# EAGLE board untitled (EAGLE 9.4.0)
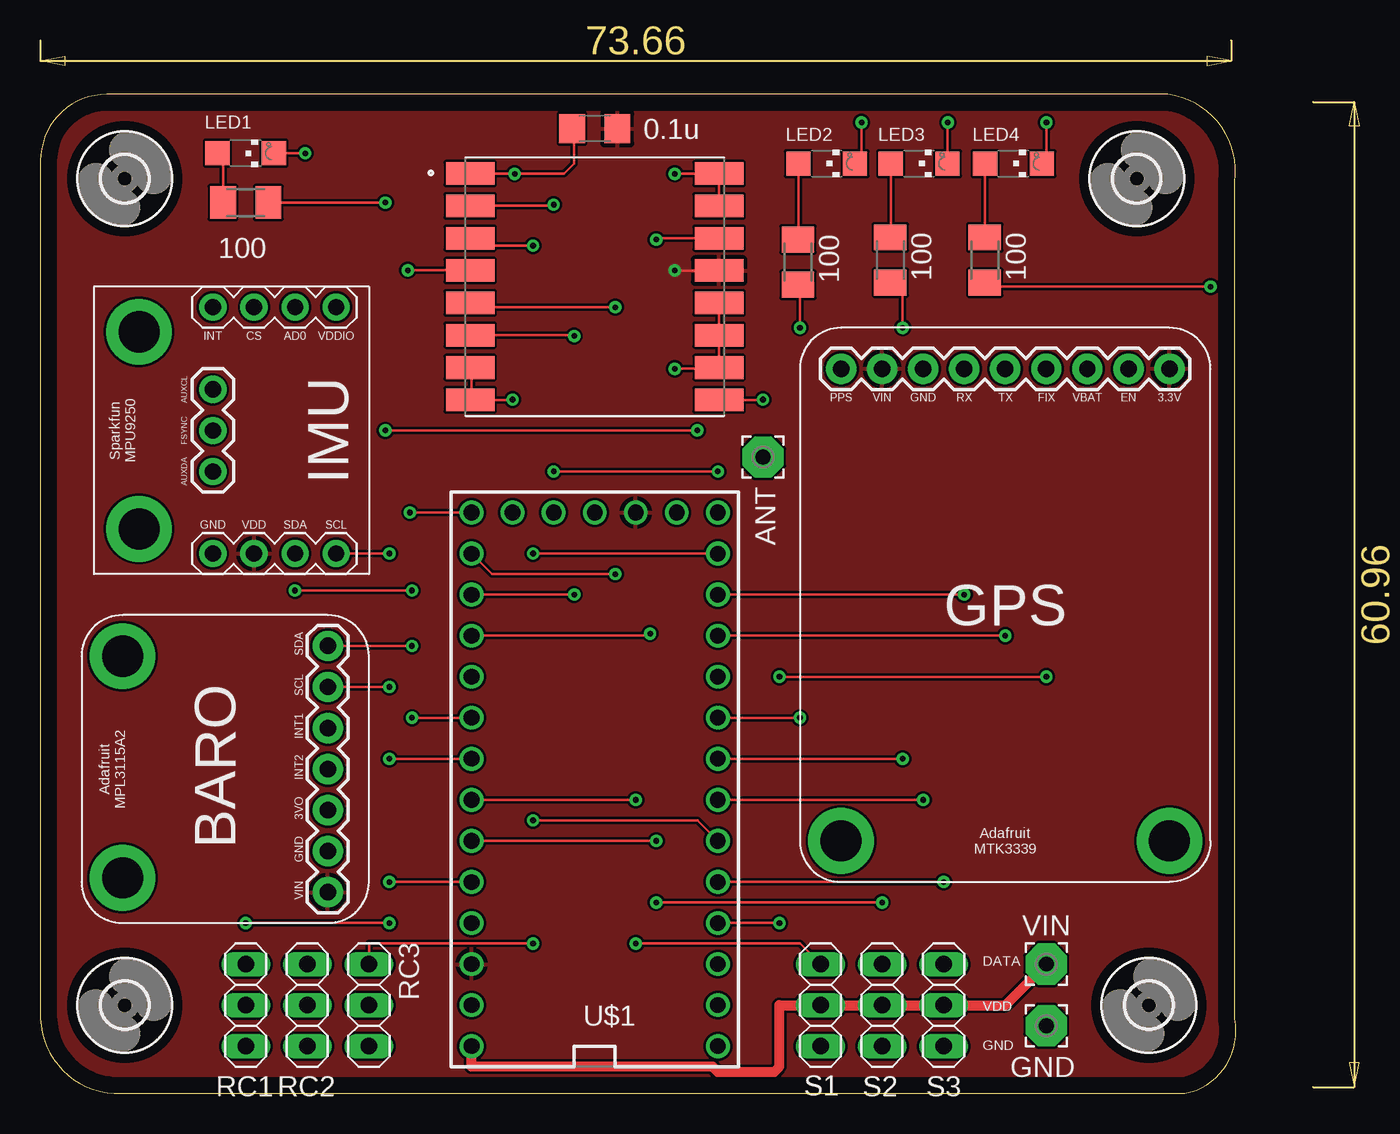
[diagram p0: board, top side]
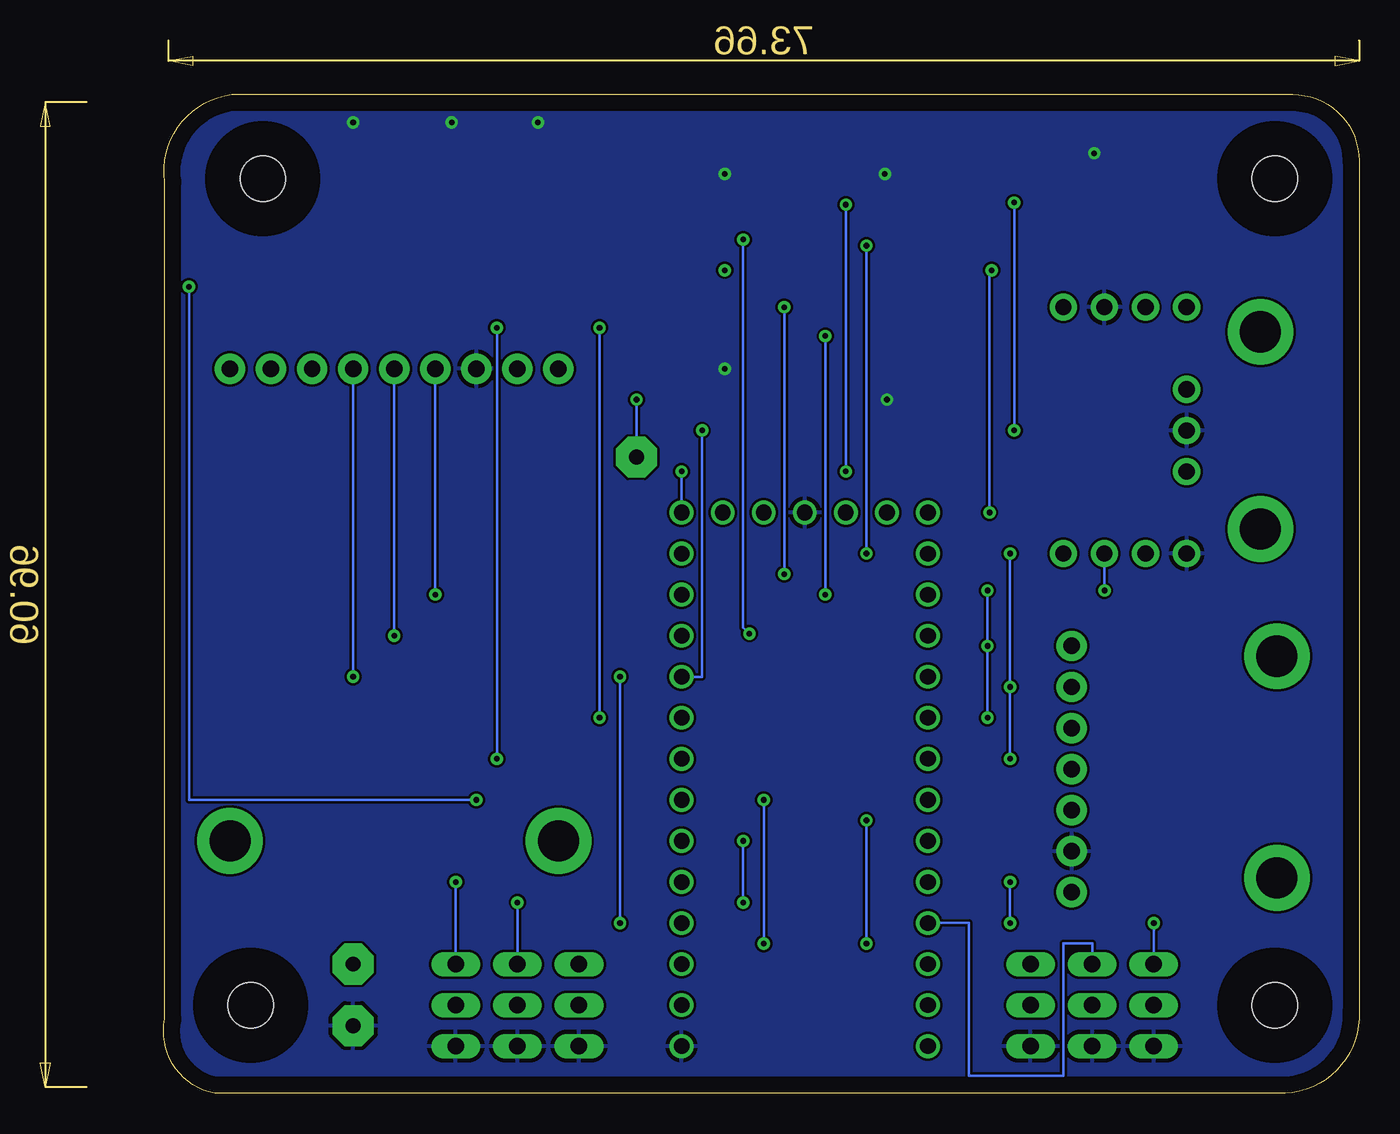
[diagram p1: board, bottom side, seen from below]

Size 73.97 x 61.81 mm. Coordinates in mm from the lower left corner, seen from the top.
Outline: 0,57.71 0,5.07 arc90 4.57,0 70.82,0 arc90 73.89,4.6 73.89,56.41 arc90 69.76,61.81 4.11,61.81 arc90 0,57.71
Copper layers (1*16): Top 0.035mm / dielectric 1.5mm / Bottom 0.035mm
Design rules "default": minimum track width 6mil, minimum drill 0.35mm, track to track 6mil, track to pad 6mil, pad to pad 6mil, via to via 6mil, smd to smd 6mil, copper to edge 40mil, drill to drill 6mil, minimum pad ring 10mil, minimum via ring 8mil, stop-mask expansion 4mil, vias tented up to drill 0mil, thermal gap 10mil

## Footprints (pad centres in the part's own frame; a part is rotated, then mirrored left to right if it is on the bottom)
2,54/0,9 = drill 0.914 pad 2.54 octagon: 1 0,0
C1206 = smd 1.6 x 1.8: 1 -1.4,0; 2 1.4,0
2,8 = hole 2.8: 0,0
CHIPLED_1206 = smd 1.5 x 1.5: A 0,-1.75; C 0,1.75
M1206 = smd 1.6 x 2: 1 -1.4,0; 2 1.4,0
1X03 = drill 1.016 long: 1 -2.54,0; 2 0,0; 3 2.54,0
ADAFRUIT_MPL3115A2_BAROMETER = drill 1.016 pad 1.88: 3VO 6.985,2.54; GND 4.445,2.54; INT1 12.065,2.54; INT2 9.525,2.54; SCL 14.605,2.54; SDA 17.145,2.54; VIN 1.905,2.54 | drill 2.54 pad 4.064: P$1 16.51,15.24; P$2 2.794,15.24
ADAFRUIT_MTK3339_GPS = drill 1.016 pad 1.88: 3.3V 2.54,2.54; EN 5.08,2.54; FIX 10.16,2.54; GND 17.78,2.54; PPS 22.86,2.54; RX 15.24,2.54; TX 12.7,2.54; VBAT 7.62,2.54; VIN 20.32,2.54 | drill 2.54 pad 4.064: P$1 22.86,31.75; P$2 2.54,31.75
SPARKFUN_MPU9250_IMU = drill 1.001 pad 1.676: AD0 4.572,1.27; AUXCL 9.652,6.35; AUXDA 9.652,11.43; CS 7.112,1.27; FSYNC 9.652,8.89; GND 9.652,16.51; SCL 2.032,16.51; SDA 4.572,16.51; VDD 7.112,16.51; VDDIO 2.032,1.27 | drill 1 pad 1.676: INT 9.652,1.27 | drill 2.54 pad 4.064: P$1 14.224,2.794; P$2 14.224,14.986
XCVR_RFM95W-915S2 = smd 3 x 1.4: 1 -7.7,7; 2 -7.7,5; 3 -7.7,3; 4 -7.7,1; 5 -7.7,-1; 6 -7.7,-3; 7 -7.7,-5; 8 -7.7,-7; 9 7.7,-7; 10 7.7,-5; 11 7.7,-3; 12 7.7,-1; 13 7.7,1; 14 7.7,3; 15 7.7,5; 16 7.7,7
TEENSY_3.0-3.2&LC_OUTER_ROW = drill 0.965: 0 -7.62,13.97; 1 -7.62,11.43; 2 -7.62,8.89; 3 -7.62,6.35; 3.3V 7.62,11.43; 3.3V1 -2.54,-16.51; 4 -7.62,3.81; 5 -7.62,1.27; 6 -7.62,-1.27; 7 -7.62,-3.81; 8 -7.62,-6.35; 9 -7.62,-8.89; 10 -7.62,-11.43; 11 -7.62,-13.97; 12 -7.62,-16.51; 13 7.62,-16.51; 14/A0 7.62,-13.97; 15/A1 7.62,-11.43; 16/A2 7.62,-8.89; 17/A3 7.62,-6.35; 18/A4 7.62,-3.81; 19/A5 7.62,-1.27; 20/A6 7.62,1.27; 21/A7 7.62,3.81; 22/A8 7.62,6.35; 23/A9 7.62,8.89; AGND 7.62,13.97; GND -7.62,16.51; GND1 0,-16.51; PGM 2.54,-16.51; RESET/DAC 5.08,-16.51; VBAT -5.08,-16.51; VIN 7.62,16.51

## Placement (x,y rotation side)
ANT  [2,54/0,9]  44.71,39.37 0 top
C2  0.1u  [C1206]  34.29,59.69 180 top
GND  [2,54/0,9]  62.23,4.19 0 top
H1  MOUNT-HOLE2.8  [2,8]  5.21,56.59 0 top
H2  MOUNT-HOLE2.8  [2,8]  68.58,5.46 0 top
H3  MOUNT-HOLE2.8  [2,8]  67.82,56.59 0 top
H4  MOUNT-HOLE2.8  [2,8]  5.21,5.46 0 top
LED1  [CHIPLED_1206]  12.7,58.17 270 top
LED2  [CHIPLED_1206]  48.64,57.53 270 top
LED3  [CHIPLED_1206]  54.36,57.53 270 top
LED4  [CHIPLED_1206]  60.2,57.53 270 top
R1  100  [M1206]  12.7,55.12 180 top
R2  100  [M1206]  46.87,51.44 90 top
R3  100  [M1206]  52.58,51.56 90 top
R4  100  [M1206]  58.42,51.56 90 top
RC1  [1X03]  12.7,5.46 270 top
RC2  [1X03]  16.51,5.46 270 top
RC3  [1X03]  20.32,5.46 270 top
S1  [1X03]  48.26,5.46 270 top
S2  [1X03]  52.07,5.46 270 top
S3  [1X03]  55.88,5.46 270 top
U1  ADAFRUIT_MPL3115A2_BAROMETER  [ADAFRUIT_MPL3115A2_BAROMETER]  20.32,10.54 90 top
U2  ADAFRUIT_MTK3339_GPS  [ADAFRUIT_MTK3339_GPS]  72.39,47.37 180 top
U4  SPARKFUN_MPU9250_IMU  [SPARKFUN_MPU9250_IMU]  20.32,49.91 180 top
U5  RFM95W-915S2  [XCVR_RFM95W-915S2]  34.29,49.91 0 top
U$1  TEENSY_3.1-3.2_OUTER_ROW  [TEENSY_3.0-3.2&LC_OUTER_ROW]  34.29,19.43 180 top
VIN  [2,54/0,9]  62.23,8 90 top

## Library data of the parts
ANT GND VIN = wirepad
C2 = rcl; SPICEPREFIX: C
H1-H4 = holes
LED1-LED4 = led
R1-R4 = rcl; SPICEPREFIX: R
RC1-RC3 S1-S3 = pinhead
U1 U2 U4 = AERO_Eagle_Library
U5 = RFM95W-915S2; DESCRIPTION: RFM95W LoRA Transceiver Module 915MHz; DIGI-KEY_PART_NUMBER: RFM95W-915S2-ND; DIGI-KEY_PURCHASE_URL: https://www.digikey.ca/product-detail/en/rf-solutions/RFM95W-915S2/RFM95W-915S2-ND/6564923?utm_source=snapeda&utm_medium=aggregator&utm_campaign=symbol; MF: RF Solutions; MP: RFM95W-915S2; PACKAGE: SMD-16 RF Solutions
U$1 = Teensy_3_and_LC_Series_Boards_v1.4

## Nets
3.3V: C2.1 U1.VIN U2.3.3V U2.VIN U4.VDD U5.13 U$1.3.3V U$1.3.3V1
AGND: U$1.AGND
EN: U5.5 U$1.14/A0
GND: C2.2 GND.1 LED1.C LED2.C LED3.C LED4.C RC1.3 RC2.3 RC3.3 S1.3 S2.3 S3.3 U1.GND U2.GND U4.AD0 U4.FSYNC U4.GND U5.1 U5.7 U5.8 U5.10 U5.11 U5.12 U5.15 U5.16 U$1.GND U$1.GND1
GPS_FIX: U2.FIX U$1.2
GPS_RX: U2.RX U$1.10
GPS_TX: U2.TX U$1.9
LED1: R1.1 U$1.8
LED2: R2.1 U$1.7
LED3: R3.1 U$1.6
LED4: R4.1 U$1.5
MISO: U5.2 U$1.12
MOSI: U5.3 U$1.11
N$1: ANT.1 U5.9
N$8: LED1.A R1.2
N$9: LED2.A R2.2
N$10: LED3.A R3.2
N$11: LED4.A R4.2
RADIO_INT: U5.14 U$1.16/A2
RECVR1: RC1.1 U$1.22/A8
RECVR2: RC2.1 U$1.23/A9
RECVR3: RC3.1 U$1.4
RESET: U5.6 U$1.15/A1
SCK: U5.4 U$1.13
SCL: U1.SCL U4.SCL U$1.19/A5
SDA: U1.SDA U4.SDA U$1.18/A4
SERVO1: S1.1 U$1.20/A6
SERVO2: S2.1 U$1.21/A7
SERVO3: S3.1 U$1.3
VBAT: U$1.VBAT
VIN: S1.2 S2.2 S3.2 U$1.VIN VIN.1

## Tracks (layer width: path | path; a pad name or v marks a point on that pad's centre or on a via)
3.3V  (via drill 0.35)
  Top 0.152: U5.13 39.26,50.91 v39.25,50.93
  pour Top: 0,-3.43 73.66,-3.43 73.66,61.34 0,61.34
EN  (via drill 0.35)
  Top 0.152: U5.5 26.86,48.64 v35.56,48.64 | U$1.14/A0 27.94,32.13 v35.56,32.13
  Bottom 0.152: v35.56,48.64 v35.56,32.13
GND  (via drill 0.35)
  Top 0.152: U5.1 29.32,56.91 v29.34,56.9 32.39,56.9 33.02,57.53 33.02,59.56 C2.2 | U5.8 26.67,42.91 | 26.67,42.91 29.2,42.91 v29.21,42.93 | v39.25,44.83 41.91,44.83 U5.10 U5.11 U5.12 | LED1.C v16.39,58.17 | LED2.C 50.8,57.94 v50.8,60.07 | LED3.C 56.11,60.04 v56.14,60.07 | LED4.C 62.23,57.81 v62.23,60.07 | v39.25,56.9 39.26,56.91 U5.16 U5.15 | U5.7 26.67,44.83 26.67,42.91
  pour Bottom: -1.27,-0.89 -1.27,62.61 74.93,62.61 74.93,-0.89
GPS_FIX  (via drill 0.35)
  Top 0.152: v62.23,25.78 v45.72,25.78 | U$1.2 v45.72,10.54
  Bottom 0.152: U2.FIX v62.23,25.78 | v45.72,25.78 v45.72,10.54
GPS_RX  (via drill 0.35)
  Top 0.152: U$1.10 v57.15,30.86
  Bottom 0.152: v57.15,30.86 U2.RX
GPS_TX  (via drill 0.35)
  Top 0.152: U$1.9 v59.69,28.32
  Bottom 0.152: v59.69,28.32 U2.TX
LED1  (via drill 0.35)
  Top 0.152: R1.1 v21.34,55.12 | v21.34,41.02 v40.64,41.02
  Bottom 0.152: v21.34,55.12 v21.34,41.02 | v40.64,41.02 40.64,25.78 U$1.8
LED2  (via drill 0.35)
  Top 0.152: U$1.7 v46.99,23.24 | v46.99,47.37 46.99,49.91 R2.1
  Bottom 0.152: v46.99,23.24 v46.99,47.37
LED3  (via drill 0.35)
  Top 0.152: R3.1 53.34,49.4 v53.34,47.37 | v53.34,20.7 U$1.6
  Bottom 0.152: v53.34,47.37 v53.34,20.7
LED4  (via drill 0.35)
  Top 0.152: U$1.5 v54.61,18.16 | R4.1 58.67,49.91 v72.39,49.91
  Bottom 0.152: v72.39,49.91 72.39,18.16 v54.61,18.16
MISO  (via drill 0.35)
  Top 0.152: v41.91,38.48 v31.75,38.48 | v31.75,54.99 31.67,54.91 U5.2
  Bottom 0.152: U$1.12 v41.91,38.48 | v31.75,38.48 v31.75,54.99
MOSI  (via drill 0.35)
  Top 0.152: U$1.11 v30.48,33.4 | v30.48,52.45 27.05,52.45 U5.3
  Bottom 0.152: v30.48,33.4 v30.48,52.45
N$1  (via drill 0.35)
  Top 0.152: U5.9 44.69,42.91 v44.71,42.93
  Bottom 0.152: v44.71,42.93 ANT.1
N$8
  Top 0.152: R1.2 11.3,57.82 LED1.A
N$9
  Top 0.152: LED2.A 46.89,52.86 R2.2
N$10
  Top 0.152: LED3.A 52.61,52.99 R3.2
N$11
  Top 0.152: LED4.A 58.42,57.5 R4.2
RADIO_INT  (via drill 0.35)
  Top 0.152: U$1.16/A2 37.72,28.32 v37.72,28.45 | U5.14 38.18,52.91 v38.1,52.83
  Bottom 0.152: v37.72,28.45 38.1,28.83 v38.1,52.83
RECVR1  (via drill 0.35)
  Top 0.152: U$1.22/A8 v21.59,13.08 | v21.59,10.54 v12.7,10.54
  Bottom 0.152: RC1.1 v12.7,10.54 | v21.59,13.08 v21.59,10.54
RECVR2
  Bottom 0.152: RC2.1 16.51,9.27 18.29,9.27 18.29,1.09 24.13,1.09 24.13,10.54 U$1.23/A9
RECVR3  (via drill 0.35)
  Top 0.152: U$1.4 40.64,16.89 v30.48,16.89 | v30.48,9.27 20.32,9.27 RC3.1
  Bottom 0.152: v30.48,16.89 v30.48,9.27
RESET  (via drill 0.35)
  Top 0.152: U5.6 32.97,46.91 v33.02,46.86 | v33.02,30.86 U$1.15/A1
  Bottom 0.152: v33.02,46.86 v33.02,30.86
SCK  (via drill 0.35)
  Top 0.152: U$1.13 v22.86,35.94 | v22.74,50.93 26.58,50.93 U5.4
  Bottom 0.152: v22.86,35.94 22.86,50.93 v22.74,50.93
SCL  (via drill 0.35)
  Top 0.152: U1.SCL v21.59,25.15 | v21.59,20.7 U$1.19/A5 | U4.SCL v21.59,33.4
  Bottom 0.152: v21.59,20.7 v21.59,25.15 v21.59,33.4
SDA  (via drill 0.35)
  Top 0.152: U1.SDA v22.99,27.69 | v22.99,23.24 U$1.18/A4 | v15.75,31.12 v22.99,31.12
  Bottom 0.152: v22.99,23.24 v22.99,27.69 v22.99,31.12 | U4.SDA v15.75,31.12
SERVO1  (via drill 0.35)
  Top 0.152: S1.1 46.99,9.27 v36.83,9.27 | v36.83,18.16 U$1.20/A6
  Bottom 0.152: v36.83,18.16 v36.83,9.27
SERVO2  (via drill 0.35)
  Top 0.152: v52.07,11.81 v38.1,11.81 | U$1.21/A7 v38.1,15.62
  Bottom 0.152: v52.07,11.81 S2.1 | v38.1,15.62 v38.1,11.81
SERVO3  (via drill 0.35)
  Top 0.152: U$1.3 v55.88,13.08
  Bottom 0.152: S3.1 v55.88,13.08
VIN
  Top 0.61: U$1.VIN 26.67,1.65 41.58,1.65 41.91,1.32 45.39,1.32 45.72,1.65 45.72,5.46 S1.2 S2.2 S3.2 59.69,5.46 VIN.1

## Text on the board
tNames: DATA | VDD | GND